# Altium PCB STM32C011F6U6TR_SOM_Bd.PcbDoc
Units mm, origin at the board's own origin, x right, y up, seen from the top; angles counter-clockwise.
Board outline 30 x 69.6 mm, 4 copper layers (Top Copper, Inner Layer 1, Inner Layer 2, Bottom Copper), stack 1.17 mm thick; 42 components, 33 nets, 399 pads, 165 vias.
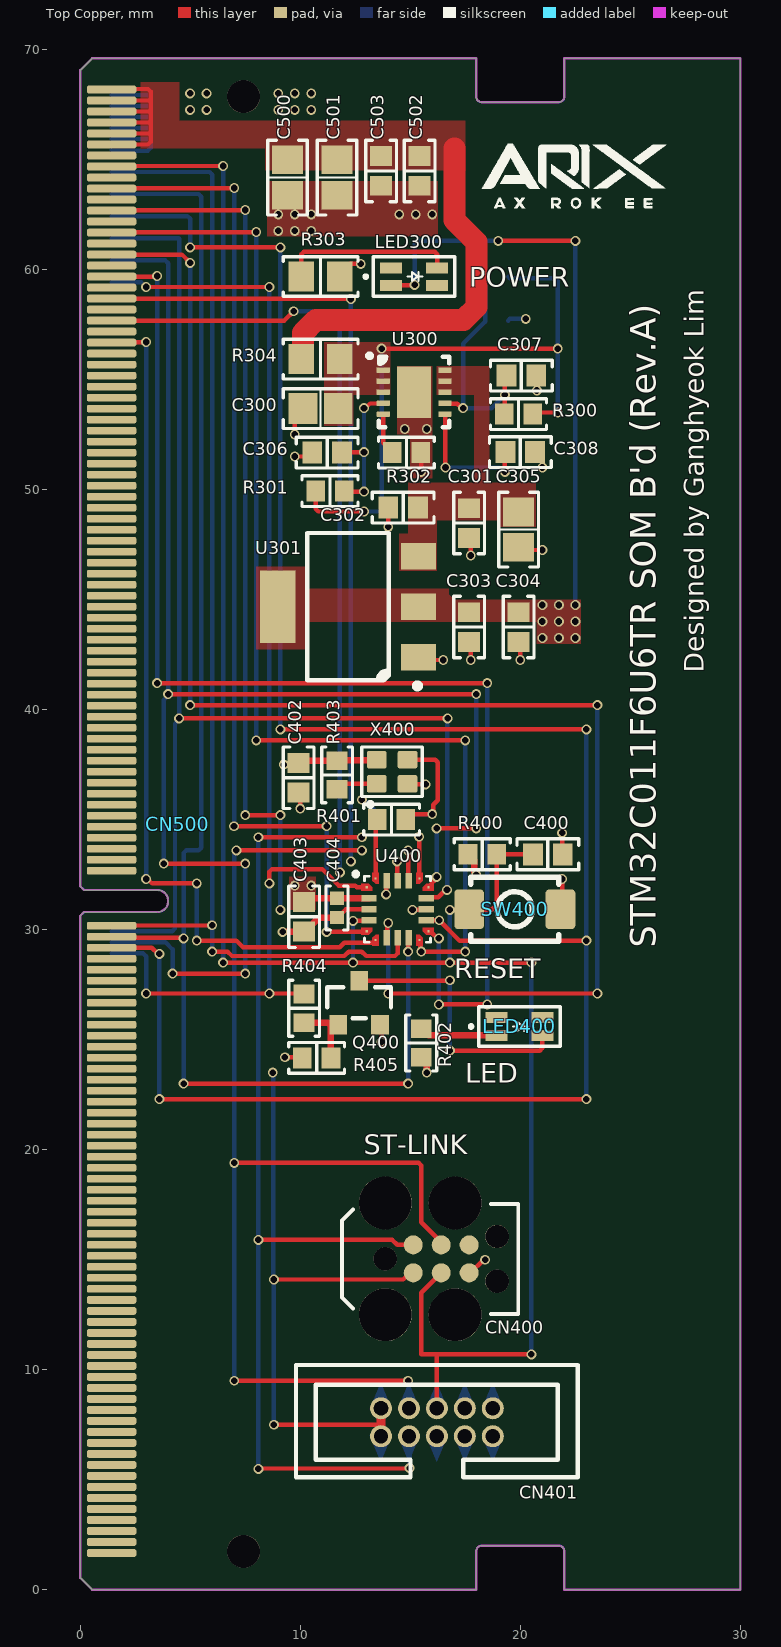
[diagram p0: Top Copper view]
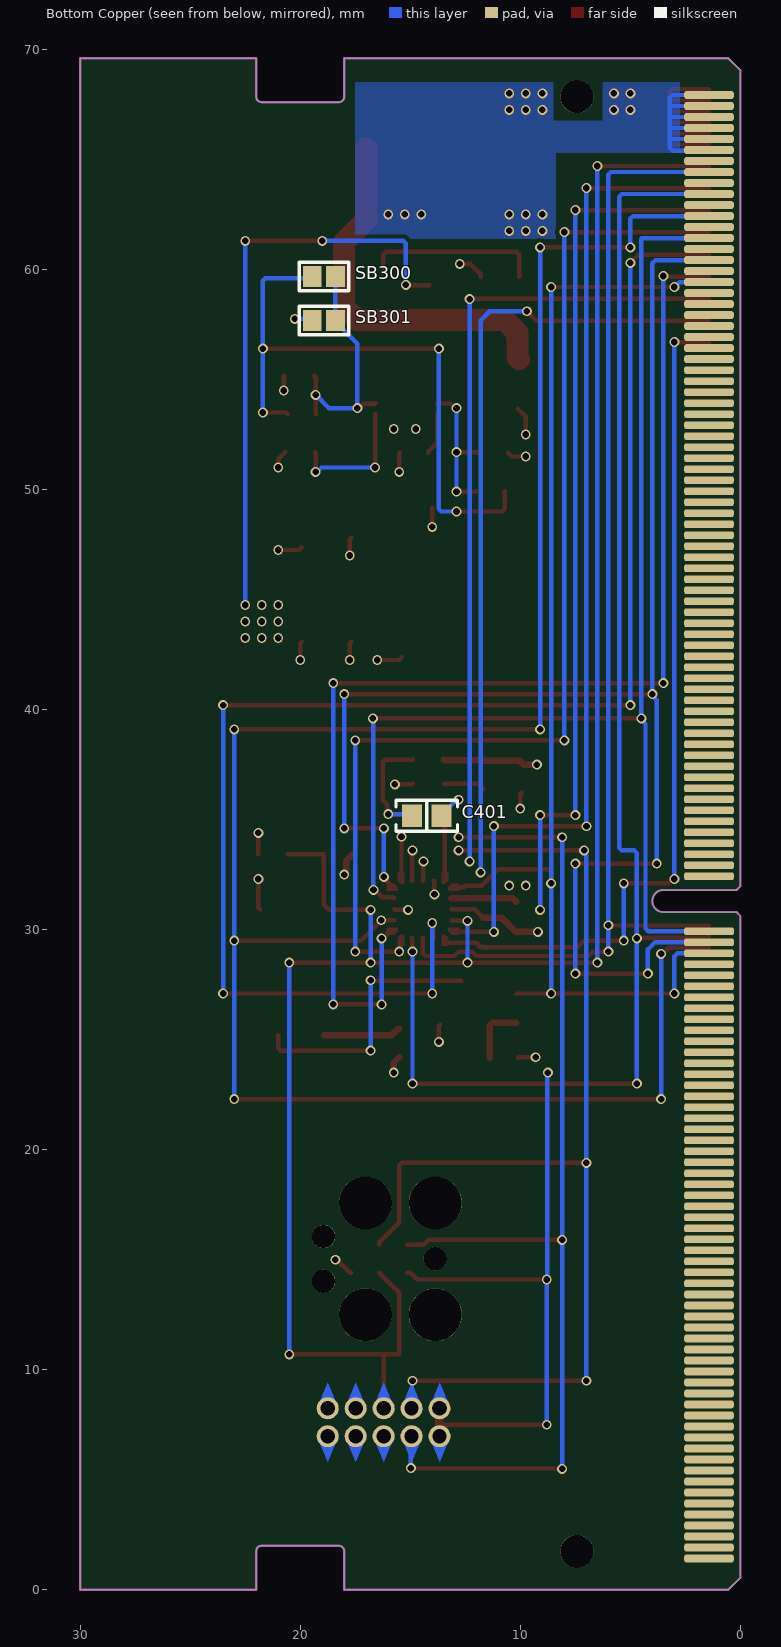
[diagram p1: Bottom Copper view, seen from below]
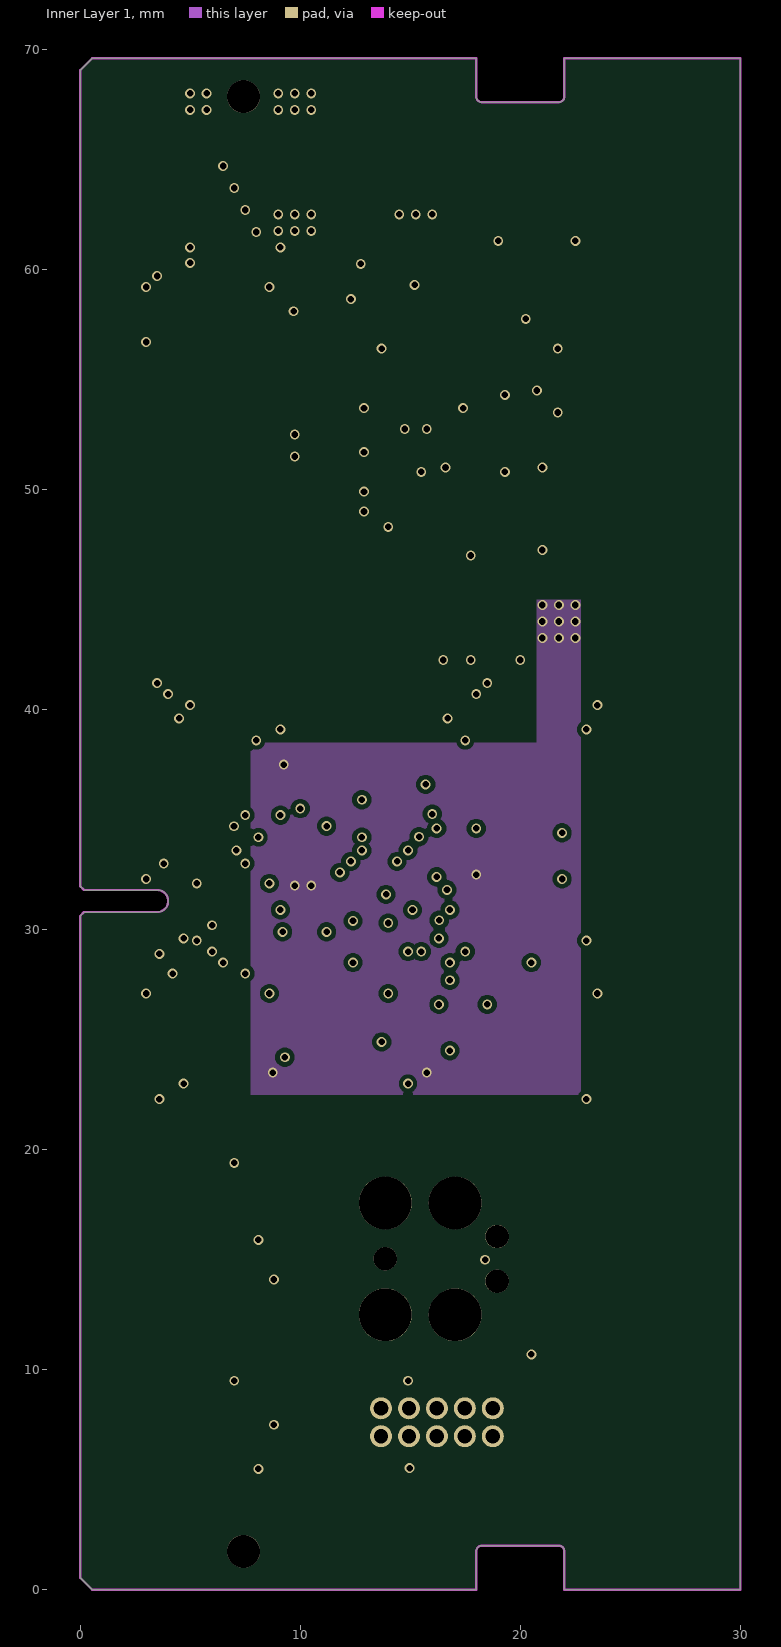
[diagram p2: Inner Layer 1]
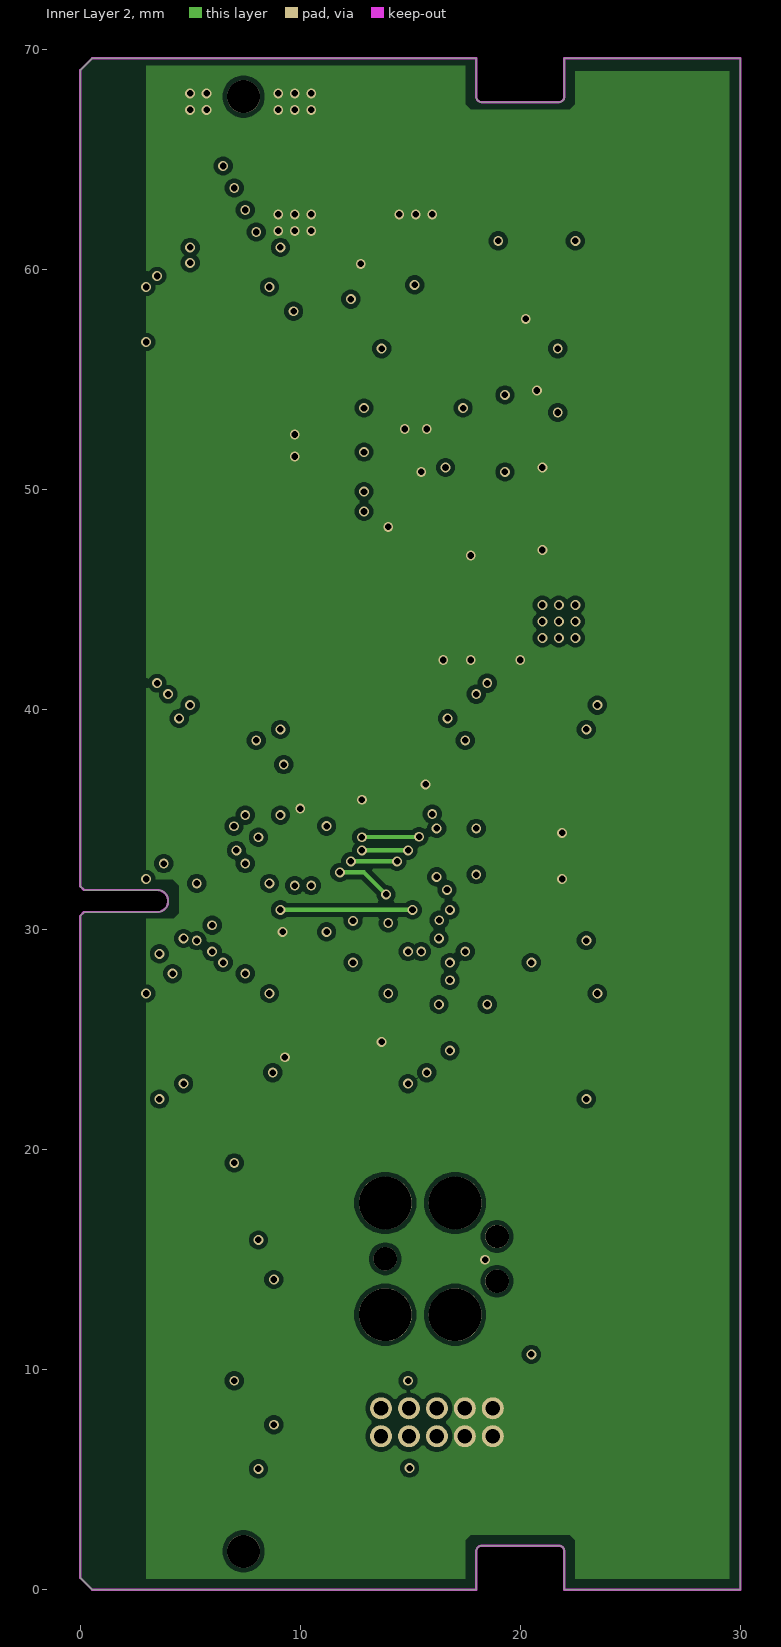
[diagram p3: Inner Layer 2]
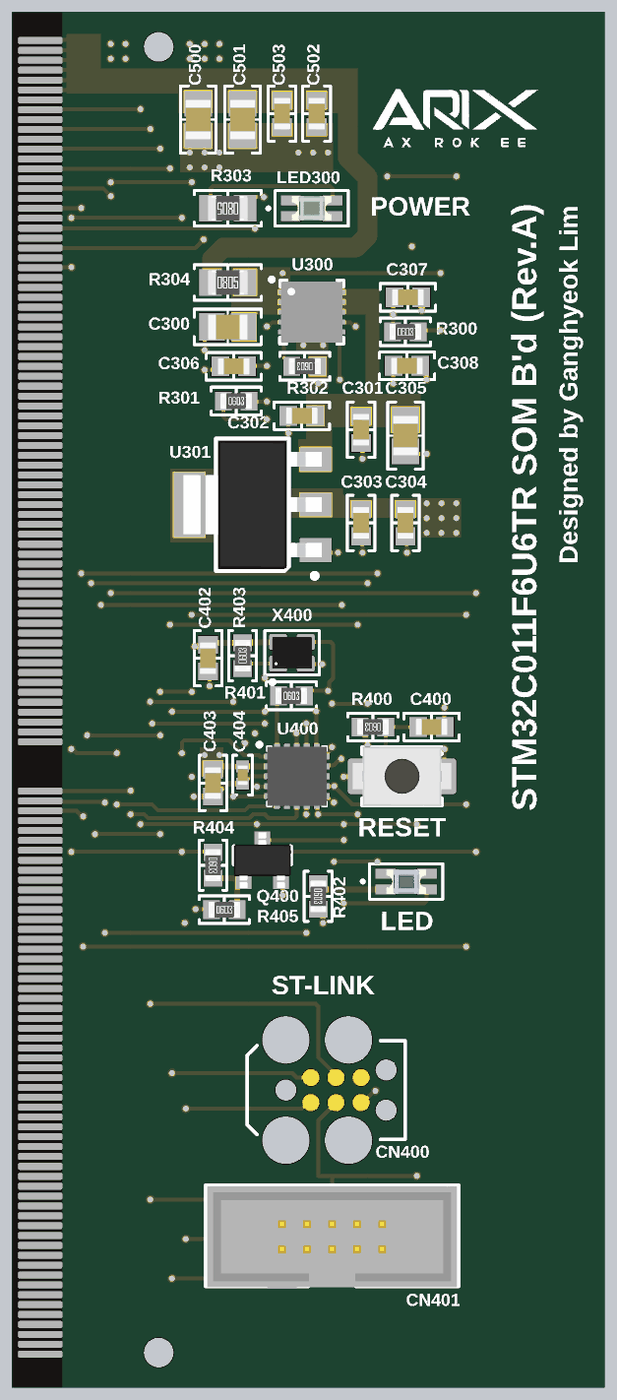
[diagram p4: 3D render of the assembled board from above, using the file's embedded part models]

## Layer stack, top to bottom
Top Mask: solder mask 0.015, Solder Resist, Dk 3.8
Top Copper: signal copper 0.035
Dielectric 1: prepreg 0.2, 7628, Dk 4.6
Inner Layer 1: signal copper 0.0175
Core: core 0.665, FR-4, Dk 4.5
Inner Layer 2: signal copper 0.0175
Dielectric 2: prepreg 0.2, 7628, Dk 4.6
Bottom Copper: signal copper 0.035
Bottom Mask: solder mask 0.015, Solder Resist, Dk 3.8

## Board outline
0.55,0 0,0.55 0,30.625 0.175,30.8 3.5,30.8 ccw(c3.5,31.3) 3.5,31.8 0.175,31.8 0,31.975 0,69.05 0.55,69.6 18,69.6 18,67.85 ccw(c18.25,67.85) 18.25,67.6 21.75,67.6 ccw(c21.75,67.85) 22,67.85 22,69.6 30,69.6 30,0 22,0 22,1.755 ccw(c21.75,1.755) 21.75,2.005 18.25,2.005 ccw(c18.25,1.755) 18,1.755 18,0

## Design rules (kind name [scope] priority, off if disabled: settings)
BoardOutlineClearance [All] p1: gap=0.2 ignorepadtopadclearanceinfootprint=FALSE except(0.4: Arc-SplitBarrior Arc-SplitContinuation Track-SplitBarrior Track-SplitContinuation SMDPad-SplitBarrior SMDPad-SplitContinuation THPad-SplitBarrior THPad-SplitContinuation Via-SplitBarrior Via-SplitContinuation Fill-SplitBarrior Fill-SplitContinuation Poly-SplitBarrior Poly-SplitContinuation Region-SplitBarrior Region-SplitContinuation Text-SplitBarrior Text-SplitContinuation)
Clearance "Clearance Bottom Layer" [OnLayer('Bottom Layer')] p1: gap=0.203 ignorepadtopadclearanceinfootprint=TRUE except(0.254: Arc-Text Track-Text SMDPad-Text THPad-Text Via-Text Fill-Text Poly-Text Region-Text Text-Text)
Clearance "Clearance Top Layer" [OnLayer('Top Layer')] p2: gap=0.203 ignorepadtopadclearanceinfootprint=TRUE except(0.254: Arc-Text Track-Text SMDPad-Text THPad-Text Via-Text Fill-Text Poly-Text Region-Text Text-Text)
Clearance [All] p3: gap=0.2 ignorepadtopadclearanceinfootprint=FALSE except(0.089: Arc-Arc Arc-Track Arc-SMDPad Track-Track Track-SMDPad SMDPad-SMDPad; 0.127: Arc-Via Track-Via SMDPad-Via THPad-Via Via-Via; 0.254: Arc-Text Track-Text SMDPad-Text THPad-Text Via-Text Fill-Text Poly-Text Region-Text Text-Text)
HoleSize [All] p1: absolutevalues=TRUE maxlimit=6.3 minlimit=0.2 maxpercent=80.000 minpercent=20.000
MinimumAnnularRing [All] p1: minimumring=0.076
MinimumSolderMaskSliver [All] p1: minsoldermaskwidth=0.1
PolygonConnect P3.3VS [InNet('P3.3VS')] p1: connectstyle=Direct reliefconductorwidth=0.254 reliefentries=4 polygonreliefangle="90 Angle" airgapwidth=0.254
PolygonConnect P5VS [InNet('P5VS')] p2: connectstyle=Direct reliefconductorwidth=0.254 reliefentries=4 polygonreliefangle="90 Angle" airgapwidth=0.254
PolygonConnect P5VS_IN [InNet('P5VS_IN')] p3: connectstyle=Direct reliefconductorwidth=0.254 reliefentries=4 polygonreliefangle="90 Angle" airgapwidth=0.254
PolygonConnect EXT_P5VS [InNet('EXT_P5VS')] p4: connectstyle=Direct reliefconductorwidth=0.508 reliefentries=4 polygonreliefangle="90 Angle" airgapwidth=0.254
PolygonConnect GND [InNet('GND')] p5: connectstyle=Direct reliefconductorwidth=0.254 reliefentries=4 polygonreliefangle="90 Angle" airgapwidth=0.254
PolygonConnect [All] p6: connectstyle=Relief reliefconductorwidth=0.254 reliefentries=4 polygonreliefangle="90 Angle" airgapwidth=0.254
RoutingCorners [All] p1: cornerstyle=Round minsetback=2.54 maxsetback=2.54
RoutingVias [All] p1: holewidth=0.3 width=0.45 viastyle="Through Hole" minholewidth=0.15 minwidth=0.3 maxholewidth=1 maxwidth=2
SilkToSilkClearance [All] p1: silktosilkclearance=0.1
SilkToSolderMaskClearance [IsPad] p1: minsilkscreentomaskgap=0.1 clearancetoexposedcopper=TRUE
SolderMaskExpansion [All] p1: expansion=0.038 istentingtop=FALSE
Width [All] p1: maxlimit=2 minlimit=0.1 preferedwidth=0.2
25 further rules are at their usual default settings.

## Components (designator, comment, footprint, x,y, rotation, side; value= is the part's Value field where it differs from the comment)
C300 "22uF/25V/2012" "CAP 2012 (0805_INCH)" 10.925,53.675 r0 top
C301 "10uF/10V/1608" "CAP 1608 (0603_INCH)" 17.675,48.475 r90 top
C302 "100nF/50V/1608" "CAP 1608 (0603_INCH)" 14.675,49.175 r0 top
C303 "100nF/50V/1608" "CAP 1608 (0603_INCH)" 17.675,43.75 r90 top
C304 "10uF/10V/1608" "CAP 1608 (0603_INCH)" 19.925,43.75 r90 top
C305 "22uF/25V/2012" "CAP 2012 (0805_INCH)" 19.925,48.175 r90 top
C306 "100nF/50V/1608" "CAP 1608 (0603_INCH)" 11.225,51.675 r0 top
C307 "100nF/50V/1608" "CAP 1608 (0603_INCH)" 20.05,55.175 r180 top
C308 "100nF/50V/1608" "CAP 1608 (0603_INCH)" 20,51.7 r180 top
C400 "100nF/50V/1608" "CAP 1608 (0603_INCH)" 21.25,33.425 r180 top
C401 "15pF/16V/1608/NC" "CAP 1608 (0603_INCH)/NC" 14.25,35.175 r0 bottom
C402 "100nF/50V/1608" "CAP 1608 (0603_INCH)" 9.925,36.9 r90 top
C403 "4.7uF/16V/1608" "CAP 1608 (0603_INCH)" 10.175,30.585 r90 top
C404 "100nF/16V/1005" "CAP 1005 (0402_INCH)" 11.675,30.985 r90 top
C500 "22uF/25V/2012" "CAP 2012 (0805_INCH)" 9.425,64.175 r90 top
C501 "22uF/25V/2012" "CAP 2012 (0805_INCH)" 11.675,64.175 r90 top
C502 "100nF/50V/1608" "CAP 1608 (0603_INCH)" 15.425,64.475 r90 top
C503 "10uF/25V/1608" "CAP 1608 (0603_INCH)" 13.675,64.475 r90 top
CN400 "TC2030-IDC" CON_TC2030-FP 16.405,15.04 r0 top
CN401 "3220-10-0100-00" "CON 3220-10-0100-00 (Hand_Solder)" 16.21,7.615 r0 top
CN500 "GOLDFINGER_SODIMM-260P" CON_DDR4-SODIMM-260P_EDGE-CONNECTOR 1.425,68.175 r270 top locked
LED300 "GREEN/2012" "LED MHT170RGBCT (GREEN)" 15.175,59.675 r0 top
LED400 "BLUE/2012" "LED MHT170RGBCT (BLUE)" 19.962,25.6 r0 top
Q400 "2N7002" "SOT 23-3 (DIODES INCORPORATED)" 12.675,26.675 r90 top
R300 "100K/1608" "RES 1608 (0603_inch)" 19.92,53.425 r0 top value=100K
R301 "12K/1608" "RES 1608 (0603_inch)" 11.355,49.925 r0 top value=12K
R302 "4.7K/1608" "RES 1608 (0603_inch)" 14.825,51.675 r180 top value=4.7K
R303 "330R/2012" "RES 2012 (0805_inch)" 10.925,59.675 r180 top value=330R
R304 "0R/2012" "RES 2012 (0805_inch)" 10.925,55.925 r0 top value=0R
R400 "100K/1608" "RES 1608 (0603_inch)" 18.275,33.425 r180 top value=100K
R401 "0R/1608" "RES 1608 (0603_inch)" 14.15,35 r0 top value=0R
R402 "470R/1608" "RES 1608 (0603_inch)" 15.5,24.85 r270 top value=470R
R403 "0R/1608" "RES 1608 (0603_inch)" 11.675,37.03 r90 top value=0R
R404 "22R/1608" "RES 1608 (0603_inch)" 10.175,26.425 r270 top value=22R
R405 "12K/1608" "RES 1608 (0603_inch)" 10.745,24.175 r0 top value=12K
SB300 "SB" "SB (Solder-Bridge)" 18.925,59.675 r0 bottom
SB301 "SB" "SB (Solder-Bridge)" 18.925,57.675 r0 bottom
SW400 "TS-1088-AR02016" SW_TS-1088-AR02016 19.75,30.925 r0 top
U300 "LS1205EVD33" IC_DFN_3x3_10L 15.175,54.425 r0 top
U301 "AMS1117-3.3" "SOT 223-3 (DIODES INCORPORATED)" 12.175,44.675 r180 top
U400 "STM32C011F6U6TR" IC_UFQFPN-20 14.425,30.925 r0 top
X400 "SX1M48.000M10F30TNN(48MHz)" OSC_SMD2016-4P 14.175,37.175 r0 top

## Footprints (in the part's own frame and the unit in brackets; to place one, negate y for a bottom-side part, rotate by r counter-clockwise, add the part's x,y. Pads: shape width x height; smd on the part's side, far side on the other; paste and mask are expansions set on the pad)
"CAP 1005 (0402_INCH)" [mm] "Chip Capacitor, 2-Leads, Body 1.02x0.51mm, IPC Medium Density"
  rect 0.6x0.64 smd mask+0.04: 1(-0.44,0) 2(0.44,0)
  silkscreen extent -1,-0.5 1,0.5, body extent -0.5,-0.26 0.5,0.26, height 0.52
"CAP 1608 (0603_INCH)" [mm] "Chip Capacitor, 2-Leads, Body 1.60x0.80mm, IPC Medium Density"
  rect 0.9x1 smd mask+0.04: 1(-0.675,0) 2(0.675,0)
  silkscreen extent -1.4,-0.7 1.4,0.7, body extent -0.8,-0.41 0.8,0.41, height 0.82
"CAP 1608 (0603_INCH)/NC" [mm] "Chip Capacitor, 2-Leads, Body 1.60x0.80mm, IPC Medium Density"
  rect 0.9x1 smd mask+0.04: 1(-0.675,0) 2(0.675,0)
  silkscreen extent -1.4,-0.7 1.4,0.7
"CAP 2012 (0805_INCH)" [mm] "Chip Capacitor, 2-Leads, Body 2.00x1.20mm, IPC Medium Density"
  rect 1.3x1.4 smd mask+0.04: 1(-0.8,0) 2(0.8,0)
  silkscreen extent -1.7,-0.9 1.7,0.9, body extent -1,-0.64 1,0.64, height 1.26
"CON 3220-10-0100-00 (Hand_Solder)" [mm] "CONN HEADER VERT 10POS 1.27MM (Hand_Solder)"
  round 1 hole 0.65 mask+0.04: 1(-2.54,-0.635) 2(-2.54,0.635) 3(-1.27,-0.635) 4(-1.27,0.635) 5(0,-0.635) 6(0,0.635) 7(1.27,-0.635) 8(1.27,0.635) 9(2.54,-0.635) 10(2.54,0.635)
  Bottom Copper region: 3.04,-0.6 2.04,-0.6 2.54,-1.8
  Bottom Copper region: 1.77,-0.6 0.77,-0.6 1.27,-1.8
  Bottom Copper region: 0.5,-0.6 -0.5,-0.6 0,-1.8
  Bottom Copper region: -0.77,-0.6 -1.77,-0.6 -1.27,-1.8
  Bottom Copper region: 2.04,0.6 3.04,0.6 2.54,1.8
  Bottom Copper region: 0.77,0.6 1.77,0.6 1.27,1.8
  Bottom Copper region: -0.5,0.6 0.5,0.6 0,1.8
  Bottom Copper region: -1.77,0.6 -0.77,0.6 -1.27,1.8
  Bottom Copper region: -3.04,0.6 -2.04,0.6 -2.54,1.8
  Bottom Copper region: -2.05,-0.6 -3.05,-0.6 -2.55,-1.8
  silkscreen extent -6.4,-2.5 6.4,2.6, body extent -6.32,-2.58 6.32,2.55, height 5.4
CON_DDR4-SODIMM-260P_EDGE-CONNECTOR [mm]
  rrect50% 0.35x2.25 smd mask+0: 1(0,0) 3(0.5,0) 5(1,0) 7(1.5,0) 9(2,0) 11(2.5,0) 13(3,0) 15(3.5,0) 17(4,0) 19(4.5,0) 21(5,0) 23(5.5,0) 25(6,0) 27(6.5,0) 29(7,0) 31(7.5,0) 33(8,0) 35(8.5,0) 37(9,0) 39(9.5,0) 41(10,0) 43(10.5,0) 45(11,0) 47(11.5,0) 49(12,0) 51(12.5,0) 53(13,0) 55(13.5,0) 57(14,0) 59(14.5,0) 61(15,0) 63(15.5,0) 65(16,0) 67(16.5,0) 69(17,0) 71(17.5,0) 73(18,0) 75(18.5,0) 77(19,0) 79(19.5,0) 81(20,0) 83(20.5,0) 85(21,0) 87(21.5,0) 89(22,0) 91(22.5,0) 93(23,0) 95(23.5,0) 97(24,0) 99(24.5,0) 101(25,0) 103(25.5,0) 105(26,0) 107(26.5,0) 109(27,0) 111(27.5,0) 113(28,0) 115(28.5,0) 117(29,0) 119(29.5,0) 121(30,0) 123(30.5,0) 125(31,0) 127(31.5,0) 129(32,0) 131(32.5,0) 133(33,0) 135(33.5,0) 137(34,0) 139(34.5,0) 141(35,0) 143(35.5,0) 145(38,0) 147(38.5,0) 149(39,0) 151(39.5,0) 153(40,0) 155(40.5,0) 157(41,0) 159(41.5,0) 161(42,0) 163(42.5,0) 165(43,0) 167(43.5,0) 169(44,0) 171(44.5,0) 173(45,0) 175(45.5,0) 177(46,0) 179(46.5,0) 181(47,0) 183(47.5,0) 185(48,0) 187(48.5,0) 189(49,0) 191(49.5,0) 193(50,0) 195(50.5,0) 197(51,0) 199(51.5,0) 201(52,0) 203(52.5,0) 205(53,0) 207(53.5,0) 209(54,0) 211(54.5,0) 213(55,0) 215(55.5,0) 217(56,0) 219(56.5,0) 221(57,0) 223(57.5,0) 225(58,0) 227(58.5,0) 229(59,0) 231(59.5,0) 233(60,0) 235(60.5,0) 237(61,0) 239(61.5,0) 241(62,0) 243(62.5,0) 245(63,0) 247(63.5,0) 249(64,0) 251(64.5,0) 253(65,0) 255(65.5,0) 257(66,0) 259(66.5,0)
  rrect50% 0.35x2.25 smd far side mask+0: 2(0.25,0) 4(0.75,0) 6(1.25,0) 8(1.75,0) 10(2.25,0) 12(2.75,0) 14(3.25,0) 16(3.75,0) 18(4.25,0) 20(4.75,0) 22(5.25,0) 24(5.75,0) 26(6.25,0) 28(6.75,0) 30(7.25,0) 32(7.75,0) 34(8.25,0) 36(8.75,0) 38(9.25,0) 40(9.75,0) 42(10.25,0) 44(10.75,0) 46(11.25,0) 48(11.75,0) 50(12.25,0) 52(12.75,0) 54(13.25,0) 56(13.75,0) 58(14.25,0) 60(14.75,0) 62(15.25,0) 64(15.75,0) 66(16.25,0) 68(16.75,0) 70(17.25,0) 72(17.75,0) 74(18.25,0) 76(18.75,0) 78(19.25,0) 80(19.75,0) 82(20.25,0) 84(20.75,0) 86(21.25,0) 88(21.75,0) 90(22.25,0) 92(22.75,0) 94(23.25,0) 96(23.75,0) 98(24.25,0) 100(24.75,0) 102(25.25,0) 104(25.75,0) 106(26.25,0) 108(26.75,0) 110(27.25,0) 112(27.75,0) 114(28.25,0) 116(28.75,0) 118(29.25,0) 120(29.75,0) 122(30.25,0) 124(30.75,0) 126(31.25,0) 128(31.75,0) 130(32.25,0) 132(32.75,0) 134(33.25,0) 136(33.75,0) 138(34.25,0) 140(34.75,0) 142(35.25,0) 144(35.75,0) 146(38.25,0) 148(38.75,0) 150(39.25,0) 152(39.75,0) 154(40.25,0) 156(40.75,0) 158(41.25,0) 160(41.75,0) 162(42.25,0) 164(42.75,0) 166(43.25,0) 168(43.75,0) 170(44.25,0) 172(44.75,0) 174(45.25,0) 176(45.75,0) 178(46.25,0) 180(46.75,0) 182(47.25,0) 184(47.75,0) 186(48.25,0) 188(48.75,0) 190(49.25,0) 192(49.75,0) 194(50.25,0) 196(50.75,0) 198(51.25,0) 200(51.75,0) 202(52.25,0) 204(52.75,0) 206(53.25,0) 208(53.75,0) 210(54.25,0) 212(54.75,0) 214(55.25,0) 216(55.75,0) 218(56.25,0) 220(56.75,0) 222(57.25,0) 224(57.75,0) 226(58.25,0) 228(58.75,0) 230(59.25,0) 232(59.75,0) 234(60.25,0) 236(60.75,0) 238(61.25,0) 240(61.75,0) 242(62.25,0) 244(62.75,0) 246(63.25,0) 248(63.75,0) 250(64.25,0) 252(64.75,0) 254(65.25,0) 256(65.75,0) 258(66.25,0) 260(66.75,0)
  round 1.5 hole 1.5 unplated: MH(0.325,6) MH(66.425,6)
CON_TC2030-FP [mm]
  round 0.863 smd paste-0.432: 1(-1.27,-0.635) 2(-1.27,0.635) 3(0,-0.635) 4(0,0.635) 5(1.27,-0.635) 6(1.27,0.635)
  round 2.4 hole 2.4 unplated: MH(-2.54,-2.54) MH(-2.54,2.54) MH(0.635,-2.54) MH(0.635,2.54)
  round 1.067 hole 1.067 unplated: MH(-2.54,0) MH(2.54,-1.016) MH(2.54,1.016)
  silkscreen extent -4.5,-2.5 3.5,2.5
IC_DFN_3x3_10L [mm] "Footprint for LS1205EVD33 (LittleFuse) (24.03.09)"
  rrect25% 0.6x0.25 smd mask+0.038: 1(-1.4,1) 2(-1.4,0.5) 3(-1.4,0) 4(-1.4,-0.5) 5(-1.4,-1) 6(1.4,-1) 7(1.4,-0.5) 8(1.4,0) 9(1.4,0.5) 10(1.4,1)
  rect 1.55x2.35 smd mask+0.038: 11(0,0)
  silkscreen extent -2.07,-1.6 1.6,1.7, body extent -1.55,-1.55 1.55,1.55, height 0.8
IC_UFQFPN-20 [mm] "ST_UFQFPN-20_3x3mm_P0.5mm"
  rect 0.1x0.1 smd paste-1 mask+0: 1(-1.4,1) 5(-1.4,-1) 6(-1,-1.4) 10(1,-1.4) 11(1.4,-1) 15(1.4,1) 16(1,1.4) 20(-1,1.4)
  rect 0.7x0.3 smd mask+0.038: 2(-1.3,0.5) 3(-1.3,0) 4(-1.3,-0.5) 12(1.3,-0.5) 13(1.3,0) 14(1.3,0.5)
  rect 0.3x0.7 smd mask+0.038: 7(-0.5,-1.3) 8(0,-1.3) 9(0.5,-1.3) 17(0.5,1.3) 18(0,1.3) 19(-0.5,1.3)
  Top Copper region: 1.65,-1.15 1.3,-1.15 1.15,-1 1.15,-0.85 1.65,-0.85
  Top Copper region: -0.85,-1.65 -1.15,-1.65 -1.15,-1.3 -1,-1.15 -0.85,-1.15
  Top Copper region: -1.15,1 -1.15,0.85 -1.65,0.85 -1.65,1.15 -1.3,1.15
  Top Copper region: 1.15,1.3 1,1.15 0.85,1.15 0.85,1.65 1.15,1.65
  Top Copper region: -0.85,1.15 -1,1.15 -1.15,1.3 -1.15,1.65 -0.85,1.65
  Top Copper region: 1.15,-1.3 1.15,-1.65 0.85,-1.65 0.85,-1.15 1,-1.15
  Top Copper region: 1.65,0.85 1.15,0.85 1.15,1 1.3,1.15 1.65,1.15
  Top Copper region: -1.15,-1 -1.3,-1.15 -1.65,-1.15 -1.65,-0.85 -1.15,-0.85
  silkscreen extent -1.95,-1.5 1.5,1.65, body extent -1.5,-1.5 1.5,1.5, height 0.6
"LED MHT170RGBCT (BLUE)" [mm] "Colorless transparence -30℃~+85℃ Positive post Common anode RGB 120° 0805  Light Emitting Diodes (LED) ROHS"
  rect 1x0.5 smd mask+0.04: 1(-1.05,0.4) 2(1.05,0.4) 3(1.05,-0.4) 4(-1.05,-0.4)
  silkscreen extent -2.25,-0.9 1.85,0.9, body extent -1,-0.62 1,0.62, height 0.9
"LED MHT170RGBCT (GREEN)" [mm] "Colorless transparence -30℃~+85℃ Positive post Common anode RGB 120° 0805  Light Emitting Diodes (LED) ROHS"
  rect 1x0.5 smd mask+0.04: 1(-1.05,0.4) 2(1.05,0.4) 3(1.05,-0.4) 4(-1.05,-0.4)
  silkscreen extent -2.25,-0.9 1.85,0.9, body extent -1,-0.62 1,0.62, height 0.9
OSC_SMD2016-4P [mm] "SMD2016-4P"
  rrect25% 0.9x0.8 smd mask+0.038: 1(-0.7,-0.55) 2(0.7,-0.55) 3(0.7,0.55) 4(-0.7,0.55)
  silkscreen extent -1.38,-1.54 1.38,1.13, body extent -1,-0.8 1,0.8, height 0.81
"RES 1608 (0603_inch)" [mm] "Chip Resistor, 2-Leads, Body 1.60x0.80mm, IPC Medium Density"
  rect 0.85x0.95 smd: 1(-0.65,0) 2(0.65,0)
  silkscreen extent -1.27,-0.7 1.27,0.7, body extent -0.8,-0.4 0.8,0.4, height 0.45
"RES 2012 (0805_inch)" [mm] "Chip Resistor, 2-Leads, Body 2.00x1.25mm, IPC Medium Density"
  rect 1.15x1.35 smd: 1(-0.875,0) 2(0.875,0)
  silkscreen extent -1.7,-0.9 1.7,0.9, body extent -1,-0.62 1,0.63, height 0.6
"SB (Solder-Bridge)" [mm] "SB (Solder-Bridge)"
  rect 0.85x0.95 smd mask+0.038: 1(-0.525,0) 2(0.525,0)
  silkscreen extent -1.12,-0.65 1.12,0.65
"SOT 23-3 (DIODES INCORPORATED)" [mm] "SOT23, 3-Leads, Body 2.90x2.40mm, Pitch 0.95mm, IPC Medium Density"
  rect 0.9x0.8 smd: 1(-1,0.95) 2(-1,-0.95) 3(1,0)
  silkscreen extent -0.7,-1.45 0.7,1.45, body extent -1.41,-1.45 1.41,1.45, height 1.5
"SOT 223-3 (DIODES INCORPORATED)" [mm] "SOT223, 4-Leads, Body 6.50x7.00mm (avg), Pitch 2.30mm, IPC Medium Density"
  rect 1.6x1.2 smd: 1(-3.2,2.3) 2(-3.2,0) 3(-3.2,-2.3)
  rect 1.6x3.3 smd: 4(3.2,0)
  silkscreen extent -3.27,-3.35 1.85,3.72, body extent -3.52,-3.25 3.5,3.25, height 1.8
SW_TS-1088-AR02016 [mm] "NO 50mA 100MΩ 100000 Times 12V 160gf@±50gf Brick nogging SPST SMD  Tactile Switches ROHS"
  rrect25% 1.35x1.8 smd mask+0.038: 1(-2.075,0) 2(2.075,0)
  silkscreen extent -2,-1.45 2,1.45, body extent -2.5,-1.5 2.5,1.5, height 1.93

## Part data
C300 C305 C500 C501: library part CAP_22uF/25V/2012, "Ceramic CAP_22uF/25V/2012", JLCPCB Part Type="Basic Part", LCSC Part #=C45783
C301 C304: library part CAP_10uF/10V/1608, "Ceramic CAP_10uF/10V/1608", JLCPCB Part Type="Basic Part", LCSC Part #=C19702
C302 C303 C306 C307 C308 C400 C402 C502: library part CAP_100nF/50V/1608, "Ceramic CAP_100nF/50V/1608", JLCPCB Part Type="Basic Part", LCSC Part #=C14663
C401: library part CAP_NC_15pF/16V/1608, "Ceramic CAP_15pF/16V/1608"
C403: library part CAP_4.7uF/16V/1608, "Ceramic CAP_4.7uF/16V/1608", JLCPCB Part Type="Basic Part", LCSC Part #=C19666
C404: library part CAP_100nF/16V/1005, "Ceramic CAP_100nF/16V/1005", JLCPCB Part Type="Basic Part", LCSC Part #=C1525
C503: library part CAP_10uF/25V/1608, "Ceramic CAP_10uF/25V/1608", JLCPCB Part Type="Basic Part", LCSC Part #=C96446
CN400: library part CON_TC2030-IDC, "Tag-Connect No-Solder SWD Debug Connector DO NOT PLACE", Manufacturer=Tag-Connect, Manufacturer Part Number=TC2030
CN401: library part CON_IDC_3220-10-0100-00, "CONN HEADER VERT 10POS 1.27MM"
CN500: library part CON_GOLD-FINGER_DDR4-SODIMM-260P, "GOLD-FINGER_DDR4-SODIMM-260P", Mating Part Number=2309409-1
LED300: library part LED_MHT170RGBCT(GREEN), "Colorless transparence -30℃~+85℃ Positive post Common anode RGB 120° 0805  Light Emitting Diodes (LED) ROHS", JLCPCB Part Type="Extended Part", LCSC Part #=C2962094
LED400: library part LED_MHT170RGBCT(BLUE), "Colorless transparence -30℃~+85℃ Positive post Common anode RGB 120° 0805  Light Emitting Diodes (LED) ROHS", JLCPCB Part Type="Extended Part", LCSC Part #=C2962094
Q400: library part FET_2N7002, "60V 115mA 200mW 7.5Ω@10V,500mA N Channel SOT-23  MOSFETs ROHS", JLCPCB Part Type="Basic Part", LCSC Part #=C8545
R300 R400: library part RES_100K/1608/0.1W, "RES_100K/1608/0.1W", JLCPCB Part Type="Basic Part", LCSC Part #=C25803, Power Rating=0.1W, Precision=1%, Size=1608
R301 R405: library part RES_12K/1608/0.1W, "RES_12K/1608/0.1W", JLCPCB Part Type="Basic Part", LCSC Part #=C22790, Power Rating=0.1W, Precision=1%, Size=1608
R302: library part RES_4.7K/1608/0.1W, "RES_4.7K/1608/0.1W", JLCPCB Part Type="Basic Part", LCSC Part #=C23162, Power Rating=0.1W, Precision=1%, Size=1608
R303: library part RES_330R/2012/0.125W, "RES_330R/2012/0.125W", JLCPCB Part Type="Basic Part", LCSC Part #=C17630, Power Rating=0.125W, Precision=1%, Size=2012
R304: library part RES_0R/2012/0.125W, "RES_0R/2012/0.125W", JLCPCB Part Type="Basic Part", LCSC Part #=C17477, Power Rating=0.1W, Precision=1%, Size=1608
R401 R403: library part RES_0R/1608/0.1W, "RES_0R/1608/0.1W", JLCPCB Part Type="Basic Part", LCSC Part #=C21189, Power Rating=0.1W, Precision=1%, Size=1608
R402: library part RES_470R/1608/0.1W, "RES_470R/1608/0.1W", JLCPCB Part Type="Basic Part", LCSC Part #=C23179, Power Rating=0.1W, Precision=1%, Size=1608
R404: library part RES_22R/1608/0.1W, "RES_22R/1608/0.1W", JLCPCB Part Type="Basic Part", LCSC Part #=C23345, Power Rating=0.1W, Precision=1%, Size=1608
SB300 SB301: library part SB_Solder-Bridge, "SB_Solder-Bridge"
SW400: library part SW_TS-1088-AR02016, "NO 50mA 100MΩ 100000 Times 12V 160gf@±50gf Brick nogging SPST SMD  Tactile Switches ROHS", JLCPCB Part Type="Extended Part", LCSC Part #=C720477
U300: library part IC_eFUSE_LS1205EVD33, "18V, 5A eFuse with Programmable Current Limit and Output Voltage Clamp, 10-DFN (3x3)"
U301: library part IC_REG_AMS1117-3.3, "72dB@(120Hz) 1A 1.3V@(800mA) Fixed 3.3V~3.3V Positive 1 SOT-223  Linear Voltage Regulators (LDO) ROHS", JLCPCB Part Type="Basic Part", LCSC Part #=C6186
U400: library part IC_MCU_STM32C011F6U6TR, "ARM® Cortex®-M0+ STM32C0 Microcontroller IC 32-Bit 48MHz 32KB (32K x 8) FLASH 20-UFQFPN (3x3)", Case/Package=UFQFPN20, JLCPCB Part Type="Extended Part", LCSC Part #=C5456206, Manufacturer=STMicroelectronics, Manufacturer Part Number=STM32C011F6U6TR
X400: library part OSC_SX1M48.000M10F30TNN(48MHz), "1.62V~3.63V ±10ppm CMOS 48MHz SMD2016-4P  Oscillators ROHS", JLCPCB Part Type="Extended Part", LCSC Part #=C2901617

## Via types
v1: diameter 0.45, hole 0.3, Top Copper to Bottom Copper, tented both sides, 165 vias

## Nets (pads, with @x,y where several pads share a name; then routed paths per layer and width w, separated by ;. In a path a pad name is that pad's centre, name@x,y a point inside that pad or via, vN(x,y) a via of type N, cw(c..) or ccw(c..) an arc to the next point about the centre after c; other vN are vias at no path point)
eFuse_ILIM: R302.2 U300.5 | length 1.9
  Top Copper w0.2: U300.5 13.775,52.125 14.175,51.725 R302.2
eFuse_SS: C308.2 U300.6 | length 6.1
  Top Copper w0.2: U300.6 16.587,53.413 16.587,51.013 v1(16.6,51) ; v1(19.3,50.8) 19.3,51.675 C308.2
  Bottom Copper w0.2: v1(16.6,51) 19.032,51 19.232,50.8 v1(19.3,50.8)
eFuse_VCP: C306.2 R301.2 U300.4 | length 6.7
  Top Copper w0.2: C306.2 11.925,51.7 v1(12.9,51.7) ; R301.2 12.03,49.9 v1(12.9,49.9) ; v1(12.9,53.7) 12.968,53.7 13.175,53.907 13.757,53.907 U300.4
  Bottom Copper w0.2: v1(12.9,49.9) v1(12.9,53.7)
EXT_48MHZ_CLK: R401.1 U400.20 | length 2.7
  Top Copper w0.2: U400.20 13.425,34.925 R401.1
EXT_P5VS: C500.2 C501.2 C502.2 C503.2 CN500.1 CN500.3 CN500.5 CN500.7 CN500.9 CN500.11 R304.1 | length 30.3
  Top Copper w0.2: CN500.11 3.083,65.675 3.2,65.792 3.2,66.246 ; CN500.9 3.129,66.175 3.2,66.246 ; CN500.7 3.175,66.675 3.2,66.7 ; CN500.5 3.175,67.175 3.2,67.2 ; CN500.3 3.175,67.675 3.2,67.7 ; CN500.1 1.45,68.2 3.083,68.2 3.2,68.083 3.2,67.7 ; 3.2,66.246 3.2,66.7 ; 3.2,66.7 3.2,67.2 ; 3.2,67.2 3.2,67.7
  Top Copper w1: R304.1 10.125,56 10.125,57.114 10.711,57.7 17.414,57.7 18,58.286 18,61.25 17,62.25 17,65.5
GND: C300.1 C301.1 C302.1 C303.1 C304.1 C305.1 C306.1 C307.1 C308.1 C400.1 C401.1 C402.1 C403.1 C404.1 C500.1 C501.1 C502.1 C503.1 CN400.5 CN401.7 CN401.8 CN401.9 CN401.10 CN500.2 CN500.4 CN500.6 CN500.8 CN500.10 CN500.12 Q400.2 R302.1 R303.1 R405.1 SB301.2 SW400.2 U300.11 U301.1 U400.3 X400.2 | length 37.5
  Top Copper w0.2: v1(9.3,24.2) 10.07,24.2 R405.1 ; v1(9.75,51.5) 10.375,51.5 C306.1 ; v1(9.75,52.5) 9.75,53.3 C300.1 ; C402.1 10,36.15 v1(10,35.5) ; C404.1@11.695,30.545 12.075,30.925 U400.3 ; R303.1 11.8,59.775 12.275,60.25 v1(12.75,60.25) ; Q400.2 13.7,25.6 v1(13.7,24.9) ; v1(14,48.3) C302.1 ; X400.2 14.9,36.6 v1(15.7,36.6) ; U301.1 15.5,42.25 v1(16.5,42.25) ; R302.1 15.5,51.65 v1(15.5,50.8) ; CN400.5 17.74,14.405 18.335,15 v1(18.4,15) ; C303.1 17.75,43 v1(17.75,42.25) ; C301.1 17.75,47.725 v1(17.75,47) ; C304.1 20,43 v1(20,42.25) ; C305.1 20.05,47.25 v1(21,47.25) ; C308.1 21,51.375 v1(21,51) ; C307.1 20.75,55.15 v1(20.75,54.5) ; SW400.2 21.9,31 v1(21.9,32.3) ; v1(21.9,34.4) 21.9,33.45 C400.1
  Top Copper w0.3: v1(9.2,29.9) 10.215,29.9 10.86,30.545 C404.1 C404.1@11.695,30.545
  Bottom Copper w0.2: CN500.12 1.45,65.4 3.083,65.4 3.2,65.517 3.2,65.9 ; CN500.10 3.175,65.925 3.2,65.9 ; CN500.8 3.175,66.425 3.2,66.4 ; CN500.6 3.175,66.925 3.2,66.9 ; CN500.4 3.129,67.425 3.2,67.354 ; CN500.2 3.083,67.925 3.2,67.808 3.2,67.354 ; v1(12.8,35.9) 12.848,35.852 12.948,35.852 13.575,35.225 C401.1 ; SB301.2 19.525,57.75 v1(20.25,57.75) ; 3.2,65.9 3.2,66.4 ; 3.2,66.4 3.2,66.9 ; 3.2,66.9 3.2,67.354
  other v1: 14.75,52.75 15.75,52.75 9,61.75 9.75,61.75 10.5,61.75 9,62.5 9.75,62.5 10.5,62.5 14.5,62.5 15.25,62.5 16,62.5 5,67.25 5.75,67.25 9,67.25 9.75,67.25 10.5,67.25 5,68 5.75,68 9,68 9.75,68 10.5,68
MCU_ADC1_IN1: CN500.47 U400.6 | length 39.4
  Top Copper w0.2: CN500.47 1.437,56.687 2.987,56.687 v1(3,56.7) ; v1(3,32.3) 3.068,32.3 3.268,32.1 v1(5.3,32.1) ; v1(5.3,29.5) 7.1,29.5 7.4,29.2 11.8,29.2 12,29.4 13.3,29.4 U400.6
  Bottom Copper w0.2: v1(3,32.3) v1(3,56.7) ; v1(5.3,29.5) v1(5.3,32.1)
MCU_GPIO_PA3: CN500.16 CN500.145 U400.8 | length 53.9
  Top Copper w0.2: CN500.145 1.437,30.188 5.988,30.188 v1(6,30.2) ; v1(6,29) 6.7,29 6.9,28.8 12,28.8 12.2,29 12.8,29 13,28.8 14.308,28.8 14.425,28.917 U400.8
  Bottom Copper w0.2: CN500.16 5.883,64.425 6,64.308 v1(6,30.2) v1(6,29)
MCU_GPIO_PA4: CN500.20 CN500.147 U400.9 | length 65.2
  Top Copper w0.2: CN500.147 1.462,29.637 4.663,29.637 v1(4.7,29.6) ; v1(4.7,23) v1(14.9,23) ; v1(14.9,29) 14.913,29.012 14.913,29.612 U400.9
  Bottom Copper w0.2: CN500.20 5.383,63.425 5.5,63.308 5.5,33.717 5.383,33.6 4.817,33.6 4.7,33.483 v1(4.7,23) ; v1(14.9,23) v1(14.9,29)
MCU_GPIO_PA7: CN500.24 CN500.149 U400.12 | length 97.6
  Top Copper w0.2: CN500.149 3.257,29.175 3.532,28.9 v1(3.6,28.9) ; v1(3.6,22.3) v1(23,22.3) ; v1(5,61) v1(9.1,61) ; v1(9.1,39.1) v1(23,39.1) ; U400.12 v1(16.317,30.424) 17.241,29.5 v1(23,29.5)
  Bottom Copper w0.2: CN500.24 4.875,62.425 5,62.3 v1(5,61) ; v1(3.6,22.3) v1(3.6,28.9) ; v1(9.1,39.1) v1(9.1,61) ; v1(23,22.3) v1(23,29.5) v1(23,39.1)
MCU_GPIO_PA11: CN500.28 CN500.146 U400.14 | length 58.6
  Top Copper w0.2: v1(4.5,39.6) v1(16.7,39.6) ; U400.14 15.775,31.475 16.269,31.475 16.603,31.809 v1(16.671,31.809)
  Bottom Copper w0.2: CN500.146 4.183,29.925 4.311,30.053 4.311,39.358 4.5,39.547 4.5,61.401 4.476,61.425 CN500.28 ; v1(16.671,31.809) 16.685,31.823 16.685,39.585 v1(16.7,39.6)
MCU_GPIO_PA12: CN500.32 CN500.148 U400.15 | length 70.7
  Top Copper w0.2: v1(3.8,33) v1(7.5,33) ; v1(4,40.7) v1(18,40.7) ; v1(4.2,28) v1(7.5,28) ; U400.15 15.869,31.969 15.869,32.002 16.2,32.332 v1(16.2,32.4) ; v1(16.2,34.6) v1(18,34.6)
  Bottom Copper w0.2: CN500.148 3.875,29.425 4.2,29.1 v1(4.2,28) ; CN500.32 3.858,60.425 4,60.283 v1(4,40.7) 4,40.632 3.8,40.432 v1(3.8,33) ; v1(7.5,28) v1(7.5,33) ; v1(16.2,32.4) v1(16.2,34.6) ; v1(18,34.6) v1(18,40.7)
MCU_I2C1_SCL: CN500.39 U400.18 | length 39.4
  Top Copper w0.2: CN500.39@1.437,58.688 CN500.39 1.439,58.661 12.287,58.661 v1(12.3,58.648) ; v1(14.4,33.1) 14.413,33.087 14.413,32.237 U400.18
  Inner Layer 2 w0.2: v1(12.3,33.1) v1(14.4,33.1)
  Bottom Copper w0.2: v1(12.3,33.1) v1(12.3,58.648)
MCU_I2C1_SDA: CN500.43 U400.19 | length 39
  Top Copper w0.2: CN500.43 9.275,57.675 v1(9.7,58.1) ; v1(13.9,31.6) 13.913,31.613 13.913,32.212 U400.19
  Inner Layer 2 w0.2: v1(11.8,32.6) 12.9,32.6 v1(13.9,31.6)
  Bottom Copper w0.2: v1(9.7,58.1) 11.383,58.1 11.8,57.683 v1(11.8,32.6)
MCU_NRST: C400.2 CN400.3 CN401.6 CN500.15 R400.1 SW400.1 U400.4 | length 95.8
  Top Copper w0.2: CN500.15 1.45,64.7 v1(6.5,64.7) ; v1(6.5,28.5) v1(12.4,28.5) v1(16.8,28.5) v1(20.5,28.5) ; v1(12.4,30.4) 12.412,30.412 13.113,30.412 U400.4 ; CN401.6 16.21,10.69 16.2,10.7 ; CN400.3 15.5,13.5 15.5,10.7 16.2,10.7 ; v1(16.8,30.9) 17.65,30.9 SW400.1 17.7,30.9 18.7,30.9 18.925,31.125 R400.1 C400.2 ; v1(20.5,10.7) 16.2,10.7
  Bottom Copper w0.2: v1(6.5,28.5) v1(6.5,64.7) ; v1(12.4,28.5) v1(12.4,30.4) ; v1(16.8,28.5) v1(16.8,30.9) ; v1(20.5,10.7) v1(20.5,28.5)
MCU_SPI1_MISO: CN500.35 U400.11 | length 55.9
  Top Copper w0.2: CN500.35 3.475,59.675 v1(3.5,59.7) ; v1(3.5,41.2) v1(18.5,41.2) ; 15.9,29.9 15.932,29.9 16.232,29.6 v1(16.3,29.6) ; v1(16.3,26.6) 16.302,26.602 v1(18.5,26.602)
  Bottom Copper w0.2: v1(3.5,41.2) v1(3.5,59.7) ; v1(16.3,26.6) v1(16.3,29.6) ; v1(18.5,26.602) v1(18.5,41.2)
MCU_SPI1_MOSI: CN500.31 U400.7 | length 68.8
  Top Copper w0.2: CN500.31 4.625,60.675 v1(5,60.3) ; v1(5,40.2) v1(23.5,40.2) ; U400.7 13.963,29.662 13.963,30.263 v1(14,30.3) ; v1(14,27.1) v1(23.5,27.1)
  Bottom Copper w0.2: v1(5,40.2) v1(5,60.3) ; v1(14,27.1) v1(14,30.3) ; v1(23.5,27.1) v1(23.5,40.2)
MCU_SPI1_SCK: CN500.27 U400.10 | length 51.3
  Top Copper w0.2: CN500.27 1.437,61.687 7.987,61.687 v1(8,61.7) ; v1(8,38.6) v1(17.5,38.6) ; U400.10 15.452,29.498 15.452,29.048 v1(15.5,29) v1(17.5,29)
  Bottom Copper w0.2: v1(8,38.6) v1(8,61.7) ; v1(17.5,29) v1(17.5,38.6)
MCU_STATUS_LED: CN500.36 CN500.150 R404.1 U400.1 | length 55.2
  Top Copper w0.2: v1(3,27.1) v1(8.6,27.1) 10.15,27.1 R404.1 ; v1(3,59.2) v1(8.6,59.2) ; v1(8.6,32.1) 8.6,32.633 8.717,32.75 11,32.75 11.75,32 12.5,32 12.575,31.925 U400.1
  Bottom Copper w0.2: CN500.150 2.858,28.925 3,28.783 v1(3,27.1) ; CN500.36@1.437,59.412 CN500.36 2.767,59.425 2.992,59.2 v1(3,59.2) ; v1(8.6,27.1) v1(8.6,32.1) v1(8.6,59.2)
MCU_SWD_SWCLK: CN400.4 CN401.4 U400.17 | length 55
  Top Copper w0.2: v1(7,9.5) v1(14.9,9.5) ; v1(7,19.4) 15.383,19.4 15.5,19.283 15.5,16.7 16.405,15.795 CN400.4 ; v1(7.1,33.6) v1(12.8,33.6) ; v1(14.9,33.6) 14.913,33.587 14.913,32.237 U400.17
  Inner Layer 2 w0.2: v1(12.8,33.6) v1(14.9,33.6)
  Bottom Copper w0.2: v1(7,9.5) v1(7,19.4) 7,33.432 7.1,33.532 v1(7.1,33.6) ; v1(14.9,9.5) 14.92,9.48 14.92,8.27 CN401.4
MCU_SWD_SWDIO: CN400.2 CN401.3 U400.16 | length 53.4
  Top Copper w0.2: v1(8.1,5.5) 8.115,5.515 14.955,5.515 v1(14.97,5.53) ; v1(8.1,15.9) 14.184,15.9 14.403,15.68 15.13,15.68 CN400.2 ; v1(8.1,34.2) v1(12.8,34.2) ; v1(15.4,34.22) 15.4,32.35 U400.16
  Inner Layer 2 w0.2: v1(12.8,34.2) 12.81,34.21 15.39,34.21 v1(15.4,34.22)
  Bottom Copper w0.2: v1(8.1,5.5) v1(8.1,34.2) ; CN401.3 14.97,6.95 v1(14.97,5.53)
MCU_USART1_RX: CN500.23 U400.13 | length 46.1
  Top Copper w0.2: CN500.23 1.437,62.687 7.488,62.687 v1(7.5,62.7) ; v1(7.5,35.2) v1(9.1,35.2) ; v1(15.1,30.9) 15.112,30.912 15.713,30.912 U400.13
  Inner Layer 2 w0.2: v1(9.1,30.9) v1(15.1,30.9)
  Bottom Copper w0.2: v1(7.5,35.2) v1(7.5,62.7) ; v1(9.1,30.9) v1(9.1,35.2)
MCU_USART1_TX: CN500.19 U400.5 | length 45.4
  Top Copper w0.2: CN500.19 1.437,63.687 6.987,63.687 v1(7,63.7) ; v1(6.991,34.697) 6.993,34.698 v1(11.2,34.7) v1(11.2,34.7) ; v1(11.2,29.9) 13,29.9 U400.5
  Bottom Copper w0.2: v1(6.991,34.697) 7,34.705 v1(7,63.7) ; v1(11.2,29.9) v1(11.2,34.7)
NetC401_2: C401.2 R401.2 X400.3 | length 6.3
  Top Copper w0.2: R401.2 15.05,35.25 v1(16,35.25) 16.048,35.298 16.048,35.673 16.25,35.875 16.25,37.608 16.133,37.725 X400.3
  Bottom Copper w0.2: C401.2 15,35.25 v1(16,35.25)
NetLED300_2: LED300.2 R303.2 | length 7.9
  Top Copper w0.2: R303.2 10.05,60.683 10.167,60.8 16.108,60.8 16.225,60.683 LED300.2
NetLED400_3: LED400.3 Q400.3 | length 12.2
  Top Copper w0.2: Q400.3 16.775,27.675 v1(16.8,27.7) ; v1(16.8,24.5) 20.883,24.5 21,24.617 21,25.188 LED400.3
  Bottom Copper w0.2: v1(16.8,24.5) v1(16.8,27.7)
NetLED400_4: LED400.4 R402.1 | length 3.5
  Top Copper w0.3: R402.1 15.55,25.5 15.85,25.2 LED400.4
NetQ400_1: Q400.1 R404.2 R405.2 | length 2.7
  Top Copper w0.3: R404.2 11.25,25.775 11.395,25.63 R405.2
NetR403_1: R403.1 X400.1 | length 1.9
  Top Copper w0.2: R403.1 11.92,36.625 X400.1
P3.3VS: C303.2 C304.2 C402.2 C403.2 C404.2 CN400.1 CN401.1 CN401.2 LED300.4 R400.2 R402.2 R403.2 U301.2 U301.4 U400.2 X400.4 | length 64.8
  Top Copper w0.2: v1(8.8,7.5) 13.555,7.5 13.67,7.615 ; v1(8.8,14.1) 14.686,14.1 14.991,14.405 CN400.1 ; LED300.4 14.137,59.287 15.187,59.287 v1(15.2,59.3) ; v1(19,61.3) v1(22.5,61.3)
  Top Copper w0.3: v1(9.25,37.5) 9.85,37.5 C402.2 10.03,37.68 11.592,37.68 11.634,37.721 R403.2 11.697,37.703 13.453,37.703 X400.4 ; C403.2 10.34,31.425 C404.2 U400.2 ; R402.2 15.75,23.95 v1(15.75,23.5) ; R400.2 17.9,33.15 17.9,32.641 18,32.541 v1(18,32.5)
  Top Copper w0.4: CN401.1 13.67,7.615 CN401.2
  Bottom Copper w0.2: v1(8.75,23.5) 8.775,23.475 8.775,14.125 v1(8.8,14.1) v1(8.8,7.5) ; v1(15.2,59.3) 15.2,61.183 15.317,61.3 v1(19,61.3) ; v1(22.5,44.75) v1(22.5,61.3)
  other v1: 9.75,32 10.5,32 21,43.25 21.75,43.25 22.5,43.25 21,44 21.75,44 22.5,44 21,44.75 21.75,44.75
P5VS: C301.2 C302.2 C305.2 U300.8 U300.9 U300.10 U301.3
P5VS_IN: C300.2 R300.2 R301.1 R304.2 SB300.2 U300.1 U300.2 U300.3 | length 28.7
  Top Copper w0.2: R301.1 10.7,49.92 10.7,49.117 10.817,49 v1(12.9,49) ; v1(13.7,56.4) v1(21.7,56.4) ; R300.2 20.645,53.5 v1(21.7,53.5)
  Bottom Copper w0.2: v1(12.9,49) 13.583,49 13.7,49.117 v1(13.7,56.4) ; SB300.2 19.525,59.6 21.583,59.6 21.7,59.483 v1(21.7,56.4) v1(21.7,53.5)
PWR_EN: C307.2 R300.1 SB300.1 SB301.1 U300.7 | length 11.2
  Top Copper w0.2: U300.7 16.6,53.9 17.132,53.9 17.332,53.7 v1(17.4,53.7) ; R300.1 19.3,53.455 v1(19.3,54.3) 19.3,55.1 C307.2
  Bottom Copper w0.2: SB300.1 SB301.1 18.4,57.625 17.4,56.625 v1(17.4,53.7) 18.7,53.7 v1(19.3,54.3)
pads on no net: CN400.6 CN400.MH CN401.5 CN500.13 CN500.14 CN500.17 CN500.18 CN500.21 CN500.22 CN500.25 CN500.26 CN500.29 CN500.30 CN500.33 CN500.34 CN500.37 CN500.38 CN500.40 CN500.41 CN500.42 CN500.44 CN500.45 CN500.46 CN500.48 CN500.49 CN500.50 CN500.51 CN500.52 CN500.53 CN500.54 CN500.55 CN500.56 CN500.57 CN500.58 CN500.59 CN500.60 CN500.61 CN500.62 CN500.63 CN500.64 CN500.65 CN500.66 CN500.67 CN500.68 CN500.69 CN500.70 CN500.71 CN500.72 CN500.73 CN500.74 CN500.75 CN500.76 CN500.77 CN500.78 CN500.79 CN500.80 CN500.81 CN500.82 CN500.83 CN500.84 CN500.85 CN500.86 CN500.87 CN500.88 CN500.89 CN500.90 CN500.91 CN500.92 CN500.93 CN500.94 CN500.95 CN500.96 CN500.97 CN500.98 CN500.99 CN500.100 CN500.101 CN500.102 CN500.103 CN500.104 CN500.105 CN500.106 CN500.107 CN500.108 CN500.109 CN500.110 CN500.111 CN500.112 CN500.113 CN500.114 CN500.115 CN500.116 CN500.117 CN500.118 CN500.119 CN500.120 CN500.121 CN500.122 CN500.123 CN500.124 CN500.125 CN500.126 CN500.127 CN500.128 CN500.129 CN500.130 CN500.131 CN500.132 CN500.133 CN500.134 CN500.135 CN500.136 CN500.137 CN500.138 CN500.139 CN500.140 CN500.141 CN500.142 CN500.143 CN500.144 CN500.151 CN500.152 CN500.153 CN500.154 CN500.155 CN500.156 CN500.157 CN500.158 CN500.159 CN500.160 CN500.161 CN500.162 CN500.163 CN500.164 CN500.165 CN500.166 CN500.167 CN500.168 CN500.169 CN500.170 CN500.171 CN500.172 CN500.173 CN500.174 CN500.175 CN500.176 CN500.177 CN500.178 CN500.179 CN500.180 CN500.181 CN500.182 CN500.183 CN500.184 CN500.185 CN500.186 CN500.187 CN500.188 CN500.189 CN500.190 CN500.191 CN500.192 CN500.193 CN500.194 CN500.195 CN500.196 CN500.197 CN500.198 CN500.199 CN500.200 CN500.201 CN500.202 CN500.203 CN500.204 CN500.205 CN500.206 CN500.207 CN500.208 CN500.209 CN500.210 CN500.211 CN500.212 CN500.213 CN500.214 CN500.215 CN500.216 CN500.217 CN500.218 CN500.219 CN500.220 CN500.221 CN500.222 CN500.223 CN500.224 CN500.225 CN500.226 CN500.227 CN500.228 CN500.229 CN500.230 CN500.231 CN500.232 CN500.233 CN500.234 CN500.235 CN500.236 CN500.237 CN500.238 CN500.239 CN500.240 CN500.241 CN500.242 CN500.243 CN500.244 CN500.245 CN500.246 CN500.247 CN500.248 CN500.249 CN500.250 CN500.251 CN500.252 CN500.253 CN500.254 CN500.255 CN500.256 CN500.257 CN500.258 CN500.259 CN500.260 CN500.MH LED300.1 LED300.3 LED400.1 LED400.2

## Polygon pours and split planes (outlines as drawn)
GND on Top Copper "DGND_Top_Layer" (solid, remove dead copper, pour order 10): 14.4,55.6 16,55.6 16,50.5 15,50.5 15,52.4 14.9,52.5 14.4,52.5
GND on Top Copper "DGND_Top_Layer" (solid, remove dead copper, pour order 9): 8.5,64 8.5,61.5 16.25,61.5 16.25,64
P3.3VS on Top Copper "DGND_Top_Layer" (solid, remove dead copper, pour order 7): 10.7,30.9 10.7,32.4 9.5,32.4 9.5,30.9
P3.3VS on Top Copper "DGND_Top_Layer" (solid, remove dead copper, pour order 5): 20.75,44 20.75,43 22.75,43 22.75,45 17,45 16.75,45.25 16.75,45.5 10.25,45.5 10.25,46.5 8,46.5 8,42.75 10.25,42.75 10.25,44
P5VS on Top Copper "DGND_Top_Layer" (solid, remove dead copper, pour order 4): 17,54.3 17.9,54.3 17.9,50.3 14.9,50.3 14.9,48 14.5,48 14.5,46.3 16.2,46.3 16.2,48.6 19,48.6 19,48.3 20.7,48.3 20.7,50.3 18.6,50.3 18.6,55.6 16.2,55.6 16.2,54.3
P5VS_IN on Top Copper "DGND_Top_Layer" (solid, remove dead copper, pour order 3): 11.1,56.7 11.1,52.9 12.4,52.9 12.4,54.3 14.1,54.3 14.1,56.7
EXT_P5VS on Top Copper "DGND_Top_Layer" (solid, remove dead copper, pour order 0): 2.75,65.5 8.4,65.5 8.4,64.5 17.5,64.5 17.5,66.75 4.5,66.75 4.5,68.5 2.75,68.5
P3.3VS on Inner Layer 1 "DGND_Top_Layer" (solid, remove dead copper, pour order 6): 22.75,45 20.75,45 20.75,38.5 7.75,38.5 7.75,22.5 22.75,22.5
GND on Bottom Copper "DGND_Top_Layer" (solid, remove dead copper, pour order 2): 8.4,65.3 8.4,61.4 17.5,61.4 17.5,65.3 17.5,68.5 8.5,68.5 8.5,66.75 6.25,66.75 6.25,68.5 2.75,68.5 2.75,65.3
GND on Inner Layer 2 "DGND_Top_Layer" (solid, remove dead copper, pour order 8): 3,69.25 3,32.3 4.2,32.3 4.5,32 4.5,30.75 4.25,30.5 3,30.5 3,0.5 17.5,0.5 17.5,2.25 17.75,2.5 22.25,2.5 22.5,2.25 22.5,0.5 29.5,0.5 29.5,69 22.5,69 22.5,67.5 22.25,67.25 17.75,67.25 17.5,67.5 17.5,69.25

## Keep-outs
Keep-Out Layer:
  the board outline again, w0.1

## Silkscreen, mask and mechanical layers (free items; w line width, h text height)
Top Overlay:
  drawing of 14 lines, arcs and shapes, not listed
  text "POWER" at 17.675,58.925 h1.52
  text "Designed by Ganghyeok Lim" at 28.642,41.675 h1.5 r90
  text "STM32C011F6U6TR SOM B'd (Rev.A)" at 26.549,29.171 h2 r90
  text "RESET" at 17,27.5 h1.52
  text "LED" at 17.5,22.75 h1.52
  text "ST-LINK" at 12.89,19.5 h1.52
Top Mask:
  rectangle: 0,0 2.55,69.6
Bottom Mask:
  rectangle: 0,0 2.55,69.6